# Altium PCB PCB1.PcbDoc
Units mm, origin at the board's own origin, x right, y up, seen from the top; angles counter-clockwise.
Board outline 20 x 39 mm, 2 copper layers (Top Layer, Bottom Layer); 52 components, 24 nets, 154 pads, 51 vias.
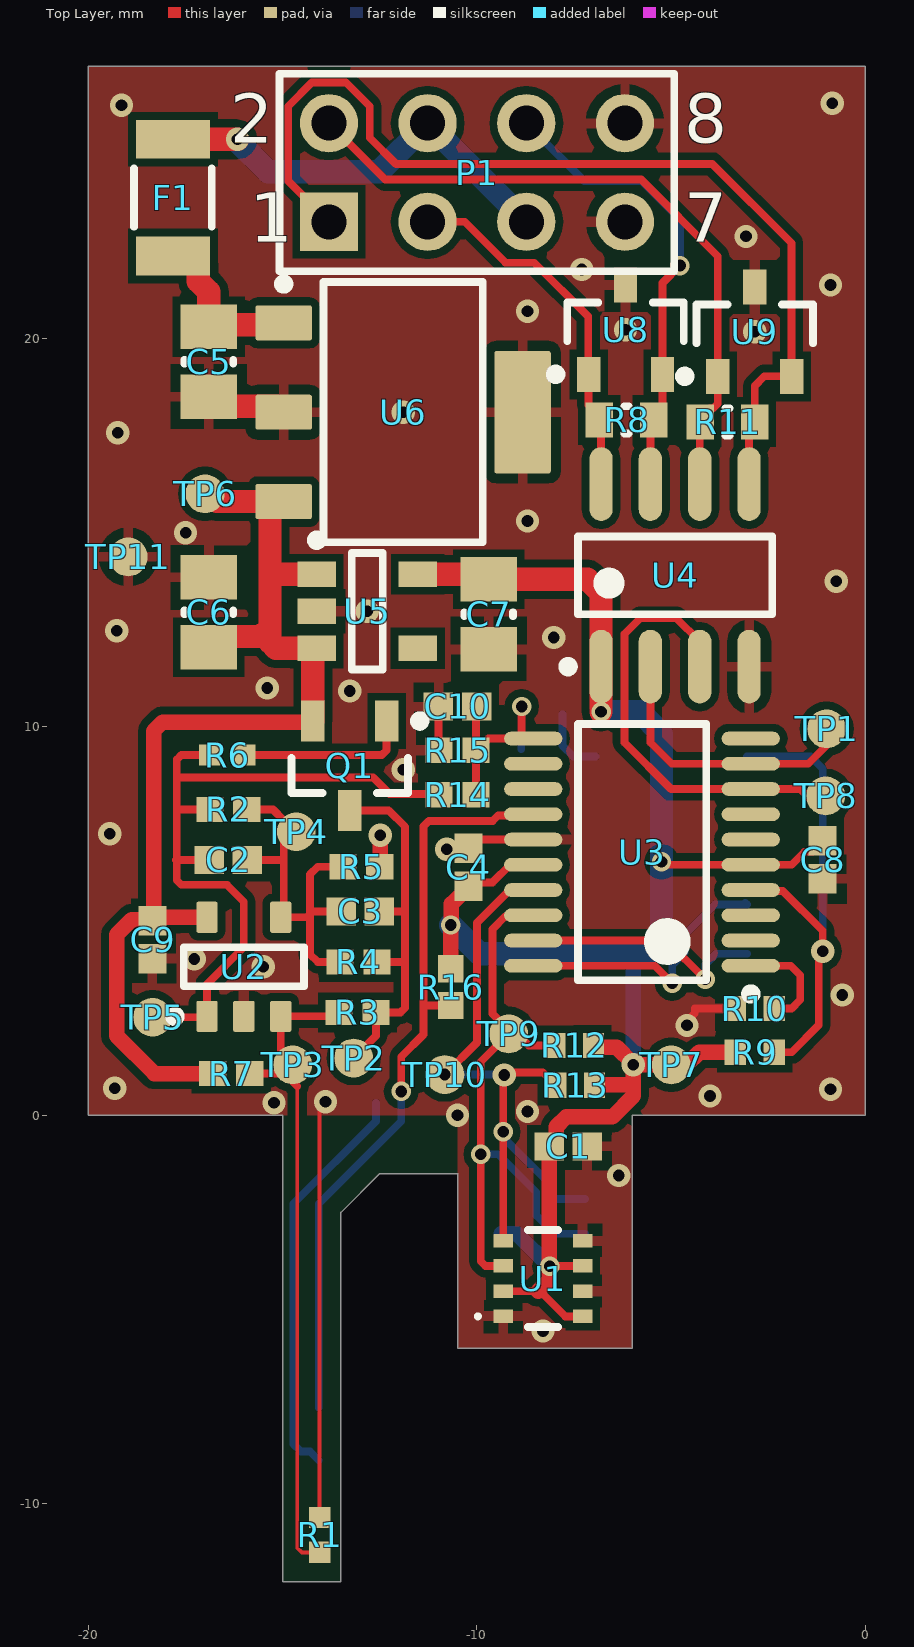
[diagram p0: Top Layer view]
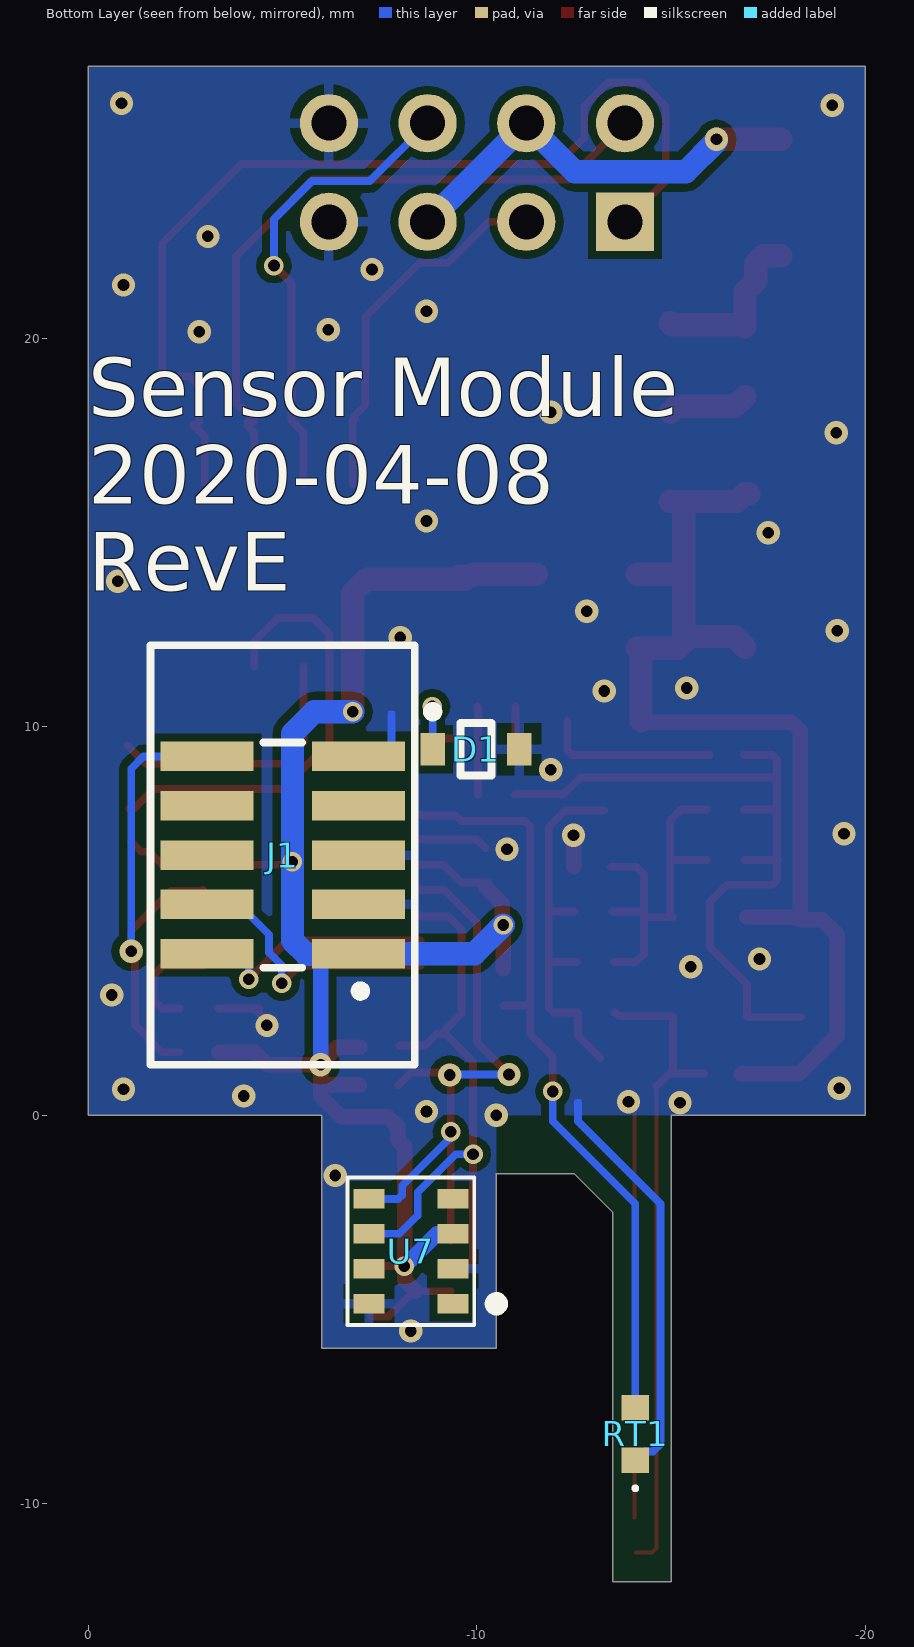
[diagram p1: Bottom Layer view, seen from below]

## Layer stack, top to bottom
Top Solder: solder mask 0.0102, Solder Resist, Dk 3.5
Top Layer: signal copper 0.0356
Dielectric 1: dielectric 0.32, FR-4, Dk 4.8
Bottom Layer: signal copper 0.0356
Bottom Solder: solder mask 0.0102, Solder Resist, Dk 3.5

## Board outline
-15,-12 -15,0 -20,0 -20,27 0,27 0,0 -6,0 -6,-6 -10.5,-6 -10.5,-1.5 -12.5,-1.5 -13.5,-2.5 -13.5,-12

## Design rules (kind name [scope] priority, off if disabled: settings)
Clearance [All] p1: gap=0.2 ignorepadtopadclearanceinfootprint=FALSE
PolygonConnect [All] p1: thpad.connectstyle=Relief thpad.reliefconductorwidth=0.254 thpad.reliefentries=4 thpad.polygonreliefangle="90 Angle" thpad.airgapwidth=0.254 smdpad.connectstyle=Relief smdpad.reliefconductorwidth=0.254 smdpad.reliefentries=4 smdpad.polygonreliefangle="90 Angle" smdpad.airgapwidth=0.254 via.connectstyle=Direct via.reliefconductorwidth=0.254 via.reliefentries=4 via.polygonreliefangle="90 Angle" via.airgapwidth=0.254
RoomDefinition Sheet1 [InComponentClass('Sheet1')] p1: confinementstyle=ConfineIn formatcopy=TRUE lockcomponents=FALSE outline -20,-12 0,-12 0,27 -20,27
RoutingVias [All] p1: holewidth=0.3 width=0.6 viastyle="Through Hole" minholewidth=0.3 minwidth=0.5 maxholewidth=0.711 maxwidth=1.27
SolderMaskExpansion SolderMaskExpansion_1 [IsVia] p1: expansion=-999 istentingtop=FALSE
SolderMaskExpansion [All] p2: expansion=0.102 istentingtop=FALSE
Width [All] p1: maxlimit=0.6 minlimit=0.2 preferedwidth=0.4
30 further rules are at their usual default settings.

## Components (designator, comment, footprint, x,y, rotation, side; value= is the part's Value field where it differs from the comment)
C1 "GRM155R71C104KA88D" CAPC1005X55X25ML05T10 -7.65,-0.8 r180 top
C2 "100nF" CAPC1005X55X25ML05T10 -16.4,6.575 r0 top
C3 "1uF" CAPC1005X55X25ML05T10 -13,5.25 r180 top
C4 "GRM155R71C104KA88D" CAPC1005X55X25ML05T10 -10.222,6.388 r270 top
C5 "CAP 10uF 10V 0805(2012)" CAPC0805(2012)145_N -16.9,19.4 r90 top value=10uF
C6 "CAP 10uF 10V 0805(2012)" CAPC0805(2012)145_N -16.9,12.95 r270 top value=10uF
C7 "CAP 10uF 10V 0805(2012)" CAPC0805(2012)145_N -9.7,12.9 r90 top value=10uF
C8 "GRM155R71C104KA88D" CAPC1005X55X25ML05T10 -1.1,6.575 r90 top
C9 "GRM155R71C104KA88D" CAPC1005X55X25ML05T10 -18.35,4.525 r90 top
C10 "TBD" CAPC1005X55X25ML05T10 -10.5,10.525 r180 top
D1 "MM3Z3V3T1G" ONSC-SOD-323-2-477-02_V -9.975,9.425 r180 bottom
F1 "nSMD020-30V" SEAANDLAND_1206 -17.825,23.625 r270 top
J1 "ARM Cortex JTAG" "1.27mm 2x5 SMD Header - no paste" -5,6.7 r90 bottom
P1 "Header 4X2" HDR2X4 -13.81,23 r0 top
Q1 "SMBT2907A" INF-SOT23_N -13.275,9 r270 top
R1 "NTC470, B=3380" RESC1005X40X25NL05T05 -14.05,-10.8 r270 top
R2 "10M 1%" RESC1005X40X25ML05T10 -16.4,7.875 r0 top
R3 "2R21 0.1%" RESC1005X40X25ML05T10 -13.075,2.65 r0 top
R4 "2K 0.1%" RESC1005X40X25ML05T10 -13.05,3.95 r0 top
R5 "75K 0.1%" RESC1005X40X25ML05T10 -12.975,6.4 r180 top
R6 "2K 1%" RESC1005X40X25NL05T05 -16.425,9.275 r180 top
R7 "100K 1%" RESC1005X40X25ML05T10 -16.325,1.075 r0 top
R8 "120R 5% 0603(1608)" RESC0603(1608)_L -6.15,17.905 r180 top value="120.00 Ohm"
R9 "10K 5% 0402(1005)" RESC0402(1005)_N -2.85,1.625 r0 top value="10000.00 Ohm"
R10 "10K 5% 0402(1005)" RESC0402(1005)_N -2.85,2.75 r180 top value="10000.00 Ohm"
R11 "120R 5% 0603(1608)" RESC0603(1608)_L -3.55,17.85 r0 top value="120.00 Ohm"
R12 "2K2 5% 0402(1005)" RESC0402(1005)_N -7.5,1.8 r0 top value="2200.00 Ohm"
R13 "2K2 5% 0402(1005)" RESC0402(1005)_N -7.475,0.775 r0 top value="2200.00 Ohm"
R14 "TBD" RESC1005X40X25ML05T10 -10.5,8.25 r180 top
R15 "TBD" RESC1005X40X25ML05T10 -10.5,9.4 r180 top
R16 "10k" RESC1005X40X25ML05T10 -10.675,3.3 r270 top
RT1 "NCP18XH103F03RB" MURA-NCP18XH103F03RB-2_V -14.075,-8.2 r90 bottom
TP1 "TEST_POINT" TP-SMD-1mm -1,9.95 r270 top
TP2 "TEST_POINT" TP-SMD-1mm -13.175,1.475 r270 top
TP3 "TEST_POINT" TP-SMD-1mm -14.744,1.302 r270 top
TP4 "TEST_POINT" TP-SMD-1mm -14.65,7.3 r270 top
TP5 "TEST_POINT" TP-SMD-1mm -18.35,2.525 r270 top
TP6 "TEST_POINT" TP-SMD-1mm -17,16 r270 top
TP7 "TEST_POINT" TP-SMD-1mm -5,1.3 r270 top
TP8 "TEST_POINT" TP-SMD-1mm -1.025,8.225 r270 top
TP9 "TEST_POINT" TP-SMD-1mm -9.183,2.098 r270 top
TP10 "TEST_POINT" TP-SMD-1mm -10.825,1.05 r270 top
TP11 "TEST_POINT" TP-SMD-1mm -18.975,14.375 r270 top
U1 "BME280" BOSC-BME280-8_V -8.3,-4.2 r180 top
U2 "TLV2471IDBVT" DBV0005A_L -16,3.825 r90 top
U3 "STM32F030F4P6" STM-TSSOP20_L -5.75,6.775 r180 top
U4 "ADM3488ARZ" ADI-R-8_L -4.9,13.9 r90 top
U5 "MIC5504-3.3YM5-TR" MCHP-SOT-23-M5_V -12.825,12.975 r0 top
U6 "LM2940IMP-9.0/NOPB" DCY0004A_L -11.9,18.1 r0 top
U7 "HP203B" HP203B -8.3,-3.5 r0 bottom
U8 "CDSOT23-SM712" SOT95P230X117-3N -6.175,20.225 r90 top
U9 "CDSOT23-SM712" SOT95P230X117-3N -2.85,20.175 r90 top

## Footprints (in the part's own frame and the unit in brackets; to place one, negate y for a bottom-side part, rotate by r counter-clockwise, add the part's x,y. Pads: shape width x height; smd on the part's side, far side on the other; paste and mask are expansions set on the pad)
"1.27mm 2x5 SMD Header - no paste" [mm]
  rect 0.76x2.4 smd paste-99: 1(-2.54,-1.95) 2(-2.54,1.95) 3(-1.27,-1.95) 4(-1.27,1.95) 5(0,-1.95) 6(0,1.95) 7(1.27,-1.95) 8(1.27,1.95) 9(2.54,-1.95) 10(2.54,1.95)
  silkscreen extent -5.4,-3.4 5.4,3.4
ADI-R-8_L [mm] "SOIC, 8-Leads, Body 5x4mm, Pitch 1.27mm, IPC High Density"
  oval 1.9x0.6 smd: 1(-2.35,1.905) 2(-2.35,0.635) 3(-2.35,-0.635) 4(-2.35,-1.905) 5(2.35,-1.905) 6(2.35,-0.635) 7(2.35,0.635) 8(2.35,1.905)
  silkscreen extent -2.47,-2.5 1,2.88, body extent -2,-2.5 2,2.5, height 1.75
BOSC-BME280-8_V [mm] "SMD, 8-Leads, Body 2.5x2.5mm, Pitch 0.65mm"
  rect 0.5x0.35 smd: 1(1.025,0.975) 2(1.025,0.325) 3(1.025,-0.325) 4(1.025,-0.975) 5(-1.025,-0.975) 6(-1.025,-0.325) 7(-1.025,0.325) 8(-1.025,0.975)
  silkscreen extent -0.39,-1.25 1.72,1.25, body extent -1.25,-1.25 1.25,1.25, height 1
CAPC0805(2012)145_N [mm] "Chip Capacitor, Body 2.0x1.2mm, Height 1.45mm, IPC Medium Density"
  rect 1.15x1.45 smd: 1(-0.9,0) 2(0.9,0)
  silkscreen extent -0.05,-0.62 0.05,0.63, body extent -1.1,-0.72 1.1,0.73, height 1.45
CAPC1005X55X25ML05T10 [mm] "Chip Capacitor, 2-Leads, Body 1.00x0.50mm, IPC Low Density"
  rect 0.76x0.72 smd: 1(-0.49,0) 2(0.49,0)
  body extent -0.53,-0.28 0.53,0.27, height 0.55
DBV0005A_L [mm] "SOT23, 5-Leads, Body 3.05x1.75mm, Pitch 0.95mm, IPC High Density"
  rrect18% 0.8x0.55 smd: 1(-1.275,0.95) 2(-1.275,0) 3(-1.275,-0.95) 4(1.275,-0.95) 5(1.275,0.95)
  silkscreen extent -1.4,-1.55 0.5,1.9, body extent -1.42,-1.46 1.42,1.46, height 1.08
DCY0004A_L [mm] "SOT223, 4-Leads, Body 6.7x3.7mm, Pitch 2.3mm, IPC High Density"
  rrect11% 1.45x0.9 smd: 1(-3.075,2.3) 2(-3.075,0) 3(-3.075,-2.3)
  rrect7% 1.45x3.15 smd: 4(3.075,0)
  silkscreen extent -3.2,-3.35 2.05,3.42, body extent -3.5,-3.25 3.5,3.25, height 1.62
HDR2X4 [mm] "Connector; Header; 4x2 Position"
  rect 1.5x1.5 hole 0.9: 1(0,0)
  round 1.5 hole 0.9: 2(0,2.54) 3(2.54,0) 4(2.54,2.54) 5(5.08,0) 6(5.08,2.54) 7(7.62,0) 8(7.62,2.54)
  silkscreen extent -1.27,-1.27 8.89,3.81
HP203B [mm] "PRECISION BAROMETER AND ALTIMETER SENSOR"
  rect 0.8x0.5 smd: 1(-1.08,1.35) 2(-1.08,0.45) 3(-1.08,-0.45) 4(-1.08,-1.35) 5(1.08,-1.35) 6(1.08,-0.45) 7(1.08,0.45) 8(1.08,1.35)
  silkscreen extent -2.35,-1.9 1.63,1.9, body extent -1.63,-1.9 1.63,1.9, height 1.2
INF-SOT23_N [mm] "SOT23, 3-Leads, Body 2.9x1.3 mm, Pitch 0.95 mm, IPC Medium Density"
  rect 1.05x0.6 smd: 1(-1.15,0.95) 2(-1.15,-0.95) 3(1.15,0)
  silkscreen extent -1.27,-1.5 0.7,1.93, body extent -0.7,-1.5 0.7,1.5, height 1.1
MCHP-SOT-23-M5_V [mm] "SOT-23, 5-Leads, Body 3x1.7mm, Pitch 0.95mm"
  rect 1x0.66 smd: 1(-1.3,0.95) 2(-1.3,0) 3(-1.3,-0.95) 4(1.3,-0.95) 5(1.3,0.95)
  silkscreen extent -1.42,-1.5 0.4,1.95, body extent -1.5,-1.5 1.5,1.5, height 1.45
MURA-NCP18XH103F03RB-2_V [mm] "Chip, 2-Leads, Body 1.6x0.8mm"
  rect 0.65x0.7 smd: 1(-0.675,0) 2(0.675,0)
  silkscreen extent -1.45,-0.05 -1.35,0.05, body extent -0.8,-0.4 0.8,0.4, height 0.8
ONSC-SOD-323-2-477-02_V [mm] "SOD, 2-Leads, Body 1.7x1.25mm"
  rect 0.63x0.83 smd: 1(-1.115,0) 2(1.115,0)
  silkscreen extent -1.24,-0.67 0.4,1.09, body extent -0.85,-0.63 0.85,0.63, height 1.06
RESC0402(1005)_N [mm] "Chip Resistor, Body 1.0x0.5mm, IPC Medium Density"
  rect 0.55x0.65 smd: 1(-0.5,0) 2(0.5,0)
  body extent -0.52,-0.27 0.53,0.28, height 0.4
RESC0603(1608)_L [mm] "Chip Resistor, Body 1.6x0.8mm, IPC High Density"
  rect 0.7x0.9 smd: 1(-0.7,0) 2(0.7,0)
  silkscreen extent -0.05,-0.35 0.05,0.35, body extent -0.85,-0.47 0.85,0.47, height 0.6
RESC1005X40X25ML05T10 [mm] "Chip Resistor, 2-Leads, Body 1.00x0.50mm, IPC Low Density"
  rect 0.7x0.65 smd: 1(-0.475,0) 2(0.475,0)
  body extent -0.53,-0.27 0.53,0.28, height 0.4
RESC1005X40X25NL05T05 [mm] "Chip Resistor, 2-Leads, Body 1.00x0.50mm, IPC Medium Density"
  rect 0.55x0.55 smd: 1(-0.45,0) 2(0.45,0)
  body extent -0.53,-0.27 0.53,0.28, height 0.4
SEAANDLAND_1206 [mm] "Surface Mount Fuses 1206"
  rrect0% 1x1.9 smd paste+0: 1(-1.5,0) 2(1.5,0)
  silkscreen extent -0.75,-1 0.75,1, body extent -1.63,-0.82 1.62,0.82, height 2
SOT95P230X117-3N [mm] "SOT23, 3-Leads, Body 2.90x2.30mm, Pitch 0.95mm, IPC Medium Density"
  rect 0.9x0.6 smd: 1(-1.15,0.95) 2(-1.15,-0.95) 3(1.15,0)
  silkscreen extent -1.27,-1.5 0.7,1.92, body extent -1.24,-1.5 1.25,1.5, height 1.17
STM-TSSOP20_L [mm] "SOP, 20-Leads, Body 6.6x4.5mm, Pitch 0.65mm, IPC High Density"
  oval 1.5x0.35 smd: 1(-2.8,2.925) 2(-2.8,2.275) 3(-2.8,1.625) 4(-2.8,0.975) 5(-2.8,0.325) 6(-2.8,-0.325) 7(-2.8,-0.975) 8(-2.8,-1.625) 9(-2.8,-2.275) 10(-2.8,-2.925) 11(2.8,-2.925) 12(2.8,-2.275) 13(2.8,-1.625) 14(2.8,-0.975) 15(2.8,-0.325) 16(2.8,0.325) 17(2.8,0.975) 18(2.8,1.625) 19(2.8,2.275) 20(2.8,2.925)
  silkscreen extent -2.93,-3.3 1.65,3.77, body extent -2.25,-3.3 2.25,3.3, height 1.2
TP-SMD-1mm [mm] "Test point, round, 1mm, SMD"
  round 1 smd paste-999: 1(0,0)

## Part data
C1 C3 C4 C8 C9 C10: library part CMP-2100-03641-1, "Chip Capacitor, 0.1 uF, +/- 10%, 16 V, -55 to 125 degC, 0402 (1005 Metric), RoHS, Tape and Reel", Capacitance=100nF, Case Code (Imperial)=0402, Case Code (Metric)=1005, Dielectric=X7R, Dielectric Material=Ceramic, Insulation Resistance=10GR, Manufacturer=Murata, Max Operating Temperature=125degC, Min Operating Temperature=-55degC, Package Description="2-Pin Surface Mount Device, Body 1 x 0.5 mm", Package Quantity=1, Tolerance=10%, Voltage=16V, Case/Package=0402, Datasheet URL=http://psearch.en.murata.com/capacitor/product/GRM155R71C104KA88%23.pdf, Datasheet Version=42675.0, Depth=0.5mm, Height=0.5mm, Lead Free=LeadFree, Length=1mm, Manufacturer URL=http://www.murata.com/, Material=Ceramic, Mount=SurfaceMount, Number of Pins=2, Package Reference=0402, Packaging=TapeandReel, Radiation Hardening=No, REACH SVHC=NoSVHC, RoHSCompliant=true, Termination=SMD/SMT, Thickness=0.022inch, Voltage Rating=16V, Voltage Rating (DC)=16V, Width=0.5mm
C2: library part CMP-2100-03641-1, "Chip Capacitor, 0.1 uF, +/- 10%, 16 V, -55 to 125 degC, 0402 (1005 Metric), RoHS, Tape and Reel", Case Code (Imperial)=0402, Case Code (Metric)=1005, Dielectric=X7R, Dielectric Material=Ceramic, Insulation Resistance=10GR, Manufacturer=Murata, Max Operating Temperature=125degC, Min Operating Temperature=-55degC, Package Description="2-Pin Surface Mount Device, Body 1 x 0.5 mm", Package Quantity=1, Tolerance=10%, Voltage=16V, Capacitance=100nF, Case/Package=0402, Datasheet URL=http://psearch.en.murata.com/capacitor/product/GRM155R71C104KA88%23.pdf, Datasheet Version=42675.0, Depth=0.5mm, Height=0.5mm, Lead Free=LeadFree, Length=1mm, Manufacturer URL=http://www.murata.com/, Material=Ceramic, Mount=SurfaceMount, Number of Pins=2, Package Reference=0402, Packaging=TapeandReel, Radiation Hardening=No, REACH SVHC=NoSVHC, RoHSCompliant=true, Termination=SMD/SMT, Thickness=0.022inch, Voltage Rating=16V, Voltage Rating (DC)=16V, Width=0.5mm
C5 C6 C7: library part CMP-1036-04922-1, "CAP 10uF 10V ±10% 0805 (2012 Metric) Thickness 1.45mm SMD", Case-EIA=0805, Case-Metric=2012, Rated Voltage="10 V", Tolerance=Â±10%, Max Thickness="1.45 mm", Technology=SMT
D1: library part CMP-1060-00672-1, "Zener Voltage Regulator, 300 mW, 2-Pin SOD-323, Pb-Free, Tape and Reel", Manufacturer="On Semiconductor", ComponentLink1Description="Manufacturer URL", ComponentLink1URL=http://www.onsemi.com/, ComponentLink2Description=Datasheet, ComponentLink2URL=http://www.onsemi.cn/pub_link/Collateral/MM3Z2V4T1-D.PDF, ComponentLink3Description="Package Specification", ComponentLink3URL=http://www.onsemi.com/pub_link/Collateral/477-02.PDF.1, DatasheetVersion="Rev. 9", Mounting Technology="Surface Mount", P Max (W)=0.3, PackageDescription="2-Pin SOD, Body 1.7 x 1.25 mm", PackageReference=SOD-323-2-477-02, PackageVersion="Rev. H, 03/2007", Packing="Tape and Reel", PartNumber=MM3Z3V3T1G, RoHS=Pb-Free, VZ Typ (V)=3.3
F1: "Surface Mount Fuses 30V 100A 200mA 460mA 1206 RoHS", Manufacturer="Sea & Land Electronic Corp", PartNumber=NSMD020-30V, ComponentLink2Description=Datasheet, ComponentLink2URL="nSMD020-30V 0-2A-30V-Self-healing-fuse_C69680.pdf"
J1: "Arm Cortex 10-pin JTAG connector", Manufacturer=Unknown/Generic, PartNumber=unknown/Generic
P1: "Header, 4-Pin, Dual row", LatestRevisionDate=17-Jul-2002, LatestRevisionNote="Re-released for DXP Platform.", Publisher="Altium Limited"
Q1: library part CMP-1178-00003-1, "PNP Silicon Switching Transistor, 60 V VCEO, 600 mA IC, SOT23, Reel, Green", Manufacturer=Infineon, ComponentLink1Description="Manufacturer URL", ComponentLink1URL=http://www.infineon.com/, ComponentLink2Description=Datasheet, ComponentLink2URL=http://www.infineon.com/dgdl/smbt2907a.pdf?folderId=db3a30431441fb5d011445fab851018e&fileId=db3a30431441fb5d011445fe084a0190, ComponentLink3Description="Package Specification", ComponentLink3URL=http://www.infineon.com/dgdl/SOT23-Package_Overview.pdf?folderId=db3a30431936bc4b0119532290053c66&fileId=db3a30431936bc4b0119533468123c85, Green=TRUE, IC="150 mA", IC (max)="600 mA", ICBO (max)="10 nA", Mounting Technology="Surface Mount", PackageDescription="3-Pin Small Outline Transistor Package, 1.3 x 2.9 mm Body, 0.95 mm Pitch", PackageReference=SOT23, PackageVersion=Apr-08, Packing=Reel, PartNumber=SMBT2907A, Polarity=PNP, VCBO (max)="60 V", VCE="10 V", VCE (max)="10 V", VCEO (max)="60 V", VEBO (max)="5 V"
R1 R6: library part CMP-2002-01187-1, Manufacturer=Panasonic, Part Number=ERT-J0EV474J
R2 R3 R4 R5 R7 R14 R15 R16: library part CMP-2002-07472-1, Manufacturer="Yageo / Phycomp", Part Number=RC0402FR-071KL
R8 R11: library part CMP-1012-00052-1, "120R 0.1W 5% 0603 (1608 Metric)  SMD", Case-EIA=0603, Case-Metric=1608, Power="0.1 W", Tolerance="5 %", Technology=SMT
R9 R10: library part CMP-1011-00098-1, "10K 0.063W 5% 0402 (1005 Metric)  SMD", Case-EIA=0402, Case-Metric=1005, Power="0.063 W", Tolerance="5 %", Technology=SMT
R12 R13: library part CMP-1011-00082-1, "2K2 0.063W 5% 0402 (1005 Metric)  SMD", Case-EIA=0402, Case-Metric=1005, Power="0.063 W", Tolerance="5 %", Technology=SMT
RT1: library part CMP-2000-05271-1, "NTC Thermistor, 10 KOhm, +/- 1%, 0.1 W, -40 to 125 degC, 0603 (1608 Metric), RoHS, Tape and Reel", Manufacturer=Murata, Rated Current=310A, Resistance=10kO, Temperature Range=-40to+125degC, Tolerance (%)=±1%, B-constant=3434K, Datasheet URL=http://www.jameco.com/Jameco/Products/ProdDS/1870999.pdf, Datasheet Version=Apr-05, Manufacturer URL=http://www.murata.com/, Type=NTC
TP1 TP2 TP3 TP4 TP5 TP6 TP7 TP8 TP9 TP10 TP11: "Test point"
U1: library part CMP-2000-05073-1, "Combined Humidity and Pressure Sensor, 1.71 to 3.6 V, -40 to 85 degC, 8-Pin SMD, RoHS, Tape and Reel", Manufacturer="Bosch Sensortec", Datasheet URL=http://datasheet.octopart.com/BME280-Bosch-datasheet-58577763.pdf, Datasheet Version="Rev. 1.2, 10/2015", Manufacturer URL=http://www.bosch-sensortec.com
U2: library part CMP-0271-00230-3, "Single Low-Power Rail-to-Rail Input / Output Operational Amplifier, 2.7 to 6 V, -40 to 125 degC, 5-pin SOT23 (DBV5), Green (RoHS & no Sb/Br)", Manufacturer="Texas Instruments", Total Supply Voltage(Max)(+5V is 5, +/-5V is 10)=6, Total Supply Voltage(Min)(+5V is 5, +/-5V is 10)=2.7, CMRR(Min)(dB)=61, Code_JEDEC=MO-178, ComponentLink1Description="Manufacturer URL", ComponentLink1URL=http://www.ti.com/, ComponentLink2Description=Datasheet, ComponentLink2URL=http://www.ti.com/general/docs/lit/getliterature.tsp?genericPartNumber=TLV2471&fileType=pdf, ComponentLink3Description="Package Specification", ComponentLink3URL=http://www.ti.com/litv/pdf/mpds018i, DatasheetVersion=SLOS232E, Eco-Plan="Green (RoHS & no Sb/Br)", IIB(Max)(pA)=50, Iq per channel(Max)(mA)=0.75, Mounting Technology="Surface Mount", Number of Channels=1, Offset Drift(Typ)(uV/C)=0.4, PackageDescription="5-Pin Plastic Small Outline, Body 1.6 x 2.9 mm, Pitch 0.95 mm", PackageReference=DBV0005A, PackageVersion="4073253-4/K, 03/2006", PartNumber=TLV2471IDBVT, Slew Rate(Typ)(V/us)=1.4, Sub Family="Low Supply Voltage Amplifier (<=2.7V), Precision Amplifier", Vio (25C)(Max)(mV)=2.2, Vn at 1kHz(Typ)(nV/rtHz)=15
U3: library part CMP-0304-00039-2, "ARM Cortex-M0 32-bit MCU, 16 KB Flash, 4 KB Internal RAM, 15 I/Os, 20-pin TSSOP, -40 to 85 degC, Tube", I/Os (High Current)=15, Operating Frequency(F) (Processor speed) (MHz)=48, Supply Voltage(Vcc) min (V)=2.4, ComponentLink1Description="Manufacturer URL", ComponentLink1URL=http://www.st.com/web/en/home.html, ComponentLink2Description=Datasheet, ComponentLink2URL=http://www.st.com/st-web-ui/static/active/en/resource/technical/document/datasheet/DM00088500.pdf, ComponentLink3Description="Package Specification", ComponentLink3URL=http://www.st.com/st-web-ui/static/active/en/resource/technical/document/datasheet/DM00065136.pdf, Core="ARM Cortex-M0", DatasheetVersion="Rev. 1", FLASH Size (Prog) (kB)=16, Internal RAM Size (kB)=4, Mounting Technology="Surface Mount", PackageDescription="20-Pin Thin Shrink Small Outline Package, 6.5 x 4.4 mm Body, 0.65 mm Pitch", PackageReference=TSSOP20, PackageVersion="Rev. 1, 11/2012", Packing=Tube, PartNumber=STM32F030F4P6
U4: library part CMP-0535-00058-1, "3.3 V Slew Rate Limited, Full-Duplex, RS-485/RS-422 Transceivers, 3 to 3.6 V, -40 to 85 degC, 8-Pin SOIC (R-8), RoHS, Tube", Manufacturer="Analog Devices", Supply Voltage="3 to 3.6 V", Temperature Range="-40 to 85 degC", ComponentLink1Description="Manufacturer URL", ComponentLink1URL=http://www.analog.com/en/index.html, ComponentLink2Description=Datasheet, ComponentLink2URL=http://www.analog.com/static/imported-files/data_sheets/ADM3483_3485_3488_3490_3491.pdf, ComponentLink3Description="Package Specification", ComponentLink3URL=http://www.analog.com/media/en/package-pcb-resources/package/pkg_pdf/soic_narrow-r/r_8.pdf, DatasheetVersion="Rev. E", Duplex=Full, Guaranteed Data Rate="0.25 Mbps", Mounting Technology="Surface Mount", Number of Drivers=1, PackageDescription="8-Pin Standard Small Outline Package, Body 4.9 x 3.9 mm, Pitch 1.27 mm", PackageVersion=06/2006, Packing=Tube, PartNumber=ADM3488ARZ, Receiver Hysteresis="50 mV", RoHS=TRUE
U5: library part CMP-2000-07604-1, "Single LDO, 2.5 to 5.5 V, Fixed Out 3.3 V, 0.3 A, -40 to 125 degC, 5-Pin SOT-23 (M5), RoHS, Tape and Reel", Case\/Package=SOT-23, Dropout Voltage=160mV, Manufacturer=Microchip, Max Input Voltage=5.5V, Max Operating Temperature=125degC, Min Current Limit=400mA, Min Input Voltage=2.5V, Min Operating Temperature=-40degC, Nominal Output Voltage=3.3V, Output Current=300mA, Package Description="5-Pin Small Outline Transistor, Body 1.6 x 2.9 mm, Pitch 0.95 mm", Datasheet URL=http://ww1.microchip.com/downloads/en/DeviceDoc/MIC550X.pdf, Datasheet Version="Rev. 2.3, 04/2015", Lead Free=LeadFree, Manufacturer URL=http://www.microchip.com/, Mount=SurfaceMount, Mounting Technology=SurfaceMount, Number of Pins=5, Number of Regulators=1, Output Voltage=3.3V, Package Reference=SOT-23, Packaging=CutTape, REACH SVHC=NoSVHC, RoHSCompliant=True
U6: library part CMP-0062-01727-3, "1A Low Dropout Regulator, 4-pin SOT-223, Pb-Free", Manufacturer="Texas Instruments", PackageTopMarking=XYTT*L0EB, PowerWise=N, Code_IPC=SOT223-4, Code_JEDEC=TO-261-AA, ComponentLink1Description="Datasheet URL", ComponentLink1URL=http://www.ti.com/general/docs/lit/getliterature.tsp?genericPartNumber=LM2940-N&fileType=pdf, CompType="LDO IC", PackageDescription="Molded SOT-223, 6.50 x 3.56 x 1.6mm Body, 4 Lead, 2.3mm Pitch", PackageReference=DCY0004A, PinCount=4, RoHS=Y
U7: "PRECISION BAROMETER AND ALTIMETER SENSOR", Manufacturer=HopeRF, PartNumber=HP203B
U8 U9: "600 WATT TVS ARRAY - ASYMMETRICAL DATA LINE PROTECTOR", Manufacturer=Bourns, ComponentLink2Description=Datasheet, ComponentLink2URL="Bourns CDSOT23-SM712.pdf", PartNumber=CDSOT23-SM712

## Via types
v1: diameter 0.6, hole 0.3, Top Layer to Bottom Layer, 40 vias
v2: diameter 0.5, hole 0.3, Top Layer to Bottom Layer, 11 vias

## Nets (pads, with @x,y where several pads share a name; then routed paths per layer and width w, separated by ;. In a path a pad name is that pad's centre, name@x,y a point inside that pad or via, vN(x,y) a via of type N, cw(c..) or ccw(c..) an arc to the next point about the centre after c; other vN are vias at no path point)
+3.3V: C1.2 C4.2 C7.2 C8.2 J1.1 R9.1 R12.2 R13.2 R16.1 TP7.1 U1.2 U1.6 U1.8 U3.5 U3.16 U4.1 U5.5 U7.3 | length 49.9
  Top Layer w0.2: C4.2 -10.123,5.997 -9.6,5.997 -9.147,6.45 U3.16 ; U1.2 -8.425,-4.525 ; -8.4,-4.5 -7.725,-5.175 U1.8 ; v2@-8.14,-3.9 v2(-8.128,-3.888) -8.115,-3.875 U1.6 ; v2(-5.25,6.525) -5.175,6.45 U3.5 -1.9,6.45 -1.565,6.785 -1.36,6.785 -1.1,7.045 C8.2
  Top Layer w0.4: R16.1 v2(-10.675,4.9) -10.656,4.919 -10.656,5.444 -10.222,5.877 C4.2 ; -8.425,-4.525 -8.4,-4.5 -8.14,-4.24 -8.14,-3.9 C1.2 ; C1.2@-8.13,-0.81 -7.96,-0.64 -7.96,-0.294 -7.706,-0.04 -6.515,-0.04 -5.975,0.5 -5.975,0.79 ; R12.2@-6.981,1.752 -6.4,1.752 v1@-5.994,1.346 ; R13.2 -6.96,0.79 -5.975,0.79 ; R9.1 -4.278,1.625 -4.603,1.3 TP7.1 v1(-5.975,1.3) -5.975,0.79
  Top Layer w0.6: U5.5 -9.9,13.925 -9.85,13.875 C7.2@-9.53,13.875 ; C7.2 -7.156,13.8 -6.805,13.449 U4.1 v2(-6.805,10.39)
  Bottom Layer w0.4: U7.3 -8.965,-3.05 v2(-8.128,-3.888) ; J1.1@-6.145,4.15 -5.975,3.98 v1@-5.975,1.346
  Bottom Layer w0.6: v2(-10.675,4.9) -9.935,4.16 J1.1 -6.94,4.15 -6.145,4.15 -5.601,4.15 -5.25,4.501 -5.25,9.827 -5.813,10.39 v2(-6.805,10.39)
+9V: C6.2 C9.2 Q1.2 R7.1 TP6.1 U2.5 U5.1 U5.3 U6.3 | length 29
  Top Layer w0.4: C9.2@-18.325,5.1 U2.5 ; R7.1 -18.3,1.075 -19.275,2.05 -19.275,4.65 -18.885,5.04 -18.575,5.04 -18.325,5.04 -18.325,9.891 -18.091,10.125 -14.325,10.125 -14.3,10.15 Q1.2
  Top Layer w0.6: TP6.1 -16.892,16 -16.692,15.8 U6.3@-15.175,15.8 ; C6.2 -16.625,12.325 -15.576,12.325 -15.525,12.376 -15.325,12.176 ; U6.3 U6.3@-15.175,15.8 ; Q1.2 -14.225,11.995 U5.3@-14.195,12.025 ; U5.3 U5.3@-14.195,12.025 ; U5.1 -15.325,13.925 ; -15.325,12.176 -15.325,13.925 ; -15.325,12.176 -15.174,12.025 U5.3@-14.195,12.025 ; -15.325,13.925 -15.325,15.65 U6.3@-15.175,15.8
+12V: F1.1 P1.4 P1.5 | length 11.2
  Top Layer w0.6: F1.1 v1(-16.165,25.125)
  Bottom Layer w0.6: v1(-16.165,25.125) -16.165,25.08 -15.375,24.29 -12.52,24.29 P1.4 P1.5 P1.5@-8.9,23
\R\S\T: J1.10 R9.2 U3.4 | length 13
  Top Layer w0.2: U3.4 -2.927,5.777 -2.127,5.777 -1.1,4.75 v1(-1.1,4.225) -1.2,4.125 -1.2,2.325 -1.9,1.625 R9.2
  Bottom Layer w0.2: J1.10 -1.415,9.24 -1.1,8.925 v1(-1.1,4.225)
BOOT0: R10.1 U3.1 | length 2.8
  Top Layer w0.2: U3.1 -1.92,3.85 -1.675,3.605 -1.675,2.975 -1.9,2.75 R10.1
GND: C1.1 C4.1 C5.1 C6.1 C7.1 C8.1 C9.1 C10.2 D1.2 J1.3 J1.5 J1.9 P1.7 P1.8 R1.1 R5.1 R10.2 R15.2 RT1.1 TP11.1 U1.1 U1.5 U1.7 U2.2 U3.15 U4.4 U5.2 U6.2 U6.4 U7.2 U7.8 U8.3 U9.3 | length 30.5
  Top Layer w0.102: R1.1 v1@-14.05,0.5
  Top Layer w0.2: C10.2 -10.99,9.415 R15.2 ; C4.1 -10,7.1 U3.15 ; v1(-4.593,2.315) -4.593,2.427 -4.392,2.628 -4.392,2.75 R10.2
  Top Layer w0.4: R5.1 -12.494,6.406 -12.494,7.208 v1(-12.487,7.214)
  Top Layer w0.6: C5.1 -16.65,18.25 -15.125,18.25 U6.2
  Bottom Layer w0.2: RT1.1 -14.3,-8.65 -14.533,-8.65 -14.725,-8.458 -14.725,-2.275 -12.6,-0.15 -12.6,0.325 ; -7.8,10.325 -7.8,9.52 -7.52,9.24 J1.9
  other v1: -8.3,-5.55 -6.35,-1.55 -10.5,0 -8.7,0.1 -15.225,0.325 -13.9,0.35 -4,0.5 -19.325,0.7 -0.9,0.675 -0.6,3.1 -15.5,3.825 -17.275,4.025 -10.775,6.85 -19.45,7.25 -11.9,8.9 -13.275,10.925 -15.4,11 -8.025,12.3 -19.275,12.475 -12.825,12.975 -0.75,13.75 -17.5,15 -8.7,15.3 -19.25,17.575 -11.9,18.1 -2.85,20.175 -6.175,20.225 -8.7,20.7 -0.9,21.375 -7.3,21.775 -3.075,22.625 -19.15,26 -0.85,26.05
I2C1_SCL: R13.1 TP10.1 U1.4 U3.17 U7.5 | length 16.4
  Top Layer w0.2: v1(-10.825,1.05) -10,1.875 -10,4.956 -9.156,5.8 U3.17 ; U1.4 v2(-9.325,-0.425) -9.325,1.014 v1(-9.3,1.039) -9.232,1.107 -8.307,1.107 R13.1
  Bottom Layer w0.2: v1(-10.825,1.05) -9.315,1.05 -9.304,1.039 v1(-9.3,1.039) ; v2(-9.325,-0.425) -9.325,-0.6 -9.29,-0.6 -8.075,-1.815 -8.075,-2.05 -7.975,-2.15 U7.5
I2C1_SDA: R12.1 TP9.1 U1.3 U3.18 U7.6 | length 16
  Top Layer w0.2: U1.3 -9.783,-3.875 -9.9,-3.758 v2(-9.9,-1) -9.9,1.381 TP9.1 ; U3.18 -8.579,5.121 -9.269,5.121 -9.6,4.79 -9.6,2.616 -9.183,2.198 TP9.1 ; R12.1 -8.668,1.8 -8.966,2.098 TP9.1
  Bottom Layer w0.2: v2(-9.9,-1) -9.456,-1 -8.475,-1.981 -8.475,-2.575 -8,-3.05 U7.6
NetC5_2: C5.2 F1.2 U6.1 | length 4.4
  Top Layer w0.6: F1.2 -17.375,22.125 -17.175,21.925 -17.175,21.475 -16.9,21.2 C5.2 -16.85,20.35 -15.025,20.35 U6.1
NetQ1_1: Q1.1 R6.1 | length 4.5
  Top Layer w0.2: R6.1@-15.991,9.275 -12.45,9.275 -12.325,9.4 Q1.1
SENSE+: R1.2 R3.1 R7.2 TP3.1 U2.3 | length 16.9
  Top Layer w0.102: -14.625,0.75 -14.625,-11.133 -14.508,-11.25 R1.2@-14.1,-11.25
  Top Layer w0.2: R7.2 TP3.1@-14.95,1.075 ; -14.625,0.75 TP3.1@-14.95,1.075 ; R3.1 -13.65,2.55 U2.3 -15.05,1.175 TP3.1@-14.95,1.075
SENSE-: C2.2 C3.2 R2.2 R4.1 R5.2 TP4.1 U2.4 | length 10
  Top Layer w0.2: R2.2 -15.25,7.875 -14.975,7.6 -14.975,6.6 ; C2.2 -15,6.575 -14.975,6.6 ; R4.1 -14.1,3.95 -14.3,4.15 -14.3,5.1 -14.3,5.175 ; C3.2 -14.225,5.25 -14.3,5.175 ; R5.2 -14.1,6.4 -14.3,6.2 -14.3,5.25 -14.3,5.175 ; -14.975,6.6 -14.975,5.175 U2.4 -14.975,5.1 -14.375,5.1 -14.3,5.175
SENSOR_RX+: P1.3 R8.2 U4.8 U8.1 | length 9.6
  Top Layer w0.2: P1.3 -10.312,23 -9.262,21.95 -8.525,21.95 -7.137,20.562 -7.137,19.087 U8.1 -7.125,18.28 -6.85,18.005 R8.2 ; U4.8 R8.2@-6.805,17.905
SENSOR_RX-: P1.6 R8.1 U4.7 U8.2 | length 12.1
  Top Layer w0.2: U4.7 -5.535,17.575 -5.225,17.885 U8.2 -5.225,21.425 v2(-4.775,21.875)
  Bottom Layer w0.2: P1.6 -7.24,24.05 -5.755,24.05 -4.775,23.07 v2(-4.775,21.875)
SENSOR_TX+: P1.1 R11.2 U4.5 U9.2 | length 25.9
  Top Layer w0.2: P1.1 -14.86,24.05 -14.86,25.975 -14.245,26.59 -13.375,26.59 -12.76,25.975 -12.76,25.168 -12.082,24.49 -3.94,24.49 -1.9,22.45 U9.2 -2.6,19.025 -2.85,18.775 R11.2 ; U4.5 -2.995,17.475 R11.2@-2.7,17.77
SENSOR_TX-: P1.2 R11.1 U4.6 U9.1 | length 17.6
  Top Layer w0.2: P1.2 -12.36,24.09 -5.773,24.09 -3.8,22.117 U9.1 -3.8,18.317 -3.917,18.2 -4,18.2 -4.25,17.95 R11.1 ; U4.6 -4.265,17.575 -4.1,17.74 R11.1@-4.1,17.85
SWCLK: J1.4 U3.20 | length 7.1
  Top Layer w0.2: U3.20 -5.425,3.85 v2(-4.975,3.4)
  Bottom Layer w0.2: v2(-4.975,3.4) -4.975,3.862 -4.65,4.187 -4.65,4.65 -3.87,5.43 J1.4 J1.4@-3.095,5.475
SWDIO: J1.2 U3.19 | length 6.4
  Top Layer w0.2: U3.19 -5.125,4.5 v2(-4.125,3.5)
  Bottom Layer w0.2: v2(-4.125,3.5) -4.125,3.88 -3.845,4.16 J1.2
USART1_RX: TP1.1 U3.9 U4.2 | length 6.9
  Top Layer w0.2: U4.2 -5.535,9.6 -4.985,9.05 U3.9 -1.475,9.05 TP1.1@-1,9.525
USART1_TX: TP8.1 U3.8 U4.3 | length 11.7
  Top Layer w0.2: U4.3 -4.265,12.2 -4.865,12.8 -5.793,12.8 -6.205,12.388 -6.205,9.6 -5.005,8.4 U3.8 -1.681,8.4 -1.181,7.9 TP8.1@-1.05,7.9
VBRIDGE: C3.1 Q1.3 R3.2 R4.2 TP2.1 | length 9.9
  Top Layer w0.2: Q1.3 -12.275,7.85 -11.85,7.425 -11.85,5.25 ; TP2.1 -12.6,2.05 R3.2 -11.967,2.65 -11.85,2.767 -11.85,3.95 ; R4.2 -11.85,3.95 ; C3.1 -11.85,5.25 ; -11.85,3.95 -11.85,5.25
VFB: C2.1 R2.1 R6.2 R14.2 TP5.1 U2.1 | length 19.4
  Top Layer w0.2: TP5.1 -16.975,2.525 U2.1 -16.95,3.375 -16,4.325 -16,5.501 -16.437,5.938 -17.608,5.938 -17.725,6.055 -17.725,6.575 -17.725,7.875 ; -17.75,6.575 C2.1 ; R2.1 -17.725,7.875 ; R6.2 -17.608,9.275 -17.725,9.158 -17.725,8.654 ; R14.2 -11,8.275 -12.25,8.275 -12.675,8.7 -17.679,8.7 -17.725,8.654 ; -17.725,7.875 -17.725,8.654
VFB_CLAMPED: C10.1 D1.1 R14.1 R15.1 U3.11 | length 5.5
  Top Layer w0.2: R14.1 R15.1 ; C10.1 -10.025,10.51 R15.1 ; v2(-8.85,10.525) -8.85,9.7 -9.7,9.7 -10,9.4 R15.1
  Bottom Layer w0.2: D1.1 -8.86,10.515 v2(-8.85,10.525)
VTEMP_ALARM: R16.2 RT1.2 U3.14 | length 19.7
  Top Layer w0.2: v2(-11.95,0.616) -11.95,1.508 -11.375,2.083 -11.375,2.8 ; R16.2 -11.35,2.825 -11.375,2.8 ; U3.14 -8.579,7.721 -9.454,7.721 -9.596,7.58 -11.235,7.58 -11.375,7.44 -11.375,2.8
  Bottom Layer w0.2: RT1.2 -14.075,-2.275 -11.95,-0.15 v2(-11.95,0.616)
pads on no net: J1.6 J1.7 J1.8 U3.2 U3.3 U3.6 U3.7 U3.10 U3.12 U3.13 U5.4 U7.1 U7.4 U7.7

## Polygon pours and split planes (outlines as drawn)
GND on Top Layer "GND_L01_P001" (solid, pour order 1): -0.75,-4.5
GND on Top Layer "GND_L01_P000" (solid, remove dead copper, pour order 0): -10.5,-6 -6,-6 -6,0 0,0 0,27 -20,27 -20,0 -10.5,0
GND on Bottom Layer "GND_L02_P002" (solid, pour order 2): -10.5,-6 -6,-6 -6,0 0,0 0,27 -20,27 -20,0 -10.5,0

## Silkscreen, mask and mechanical layers (free items; w line width, h text height)
Bottom Overlay:
  text "Sensor Module / 2020-04-08 / RevE" at 0,13.5 h1.5
Mechanical 1:
  the board outline again, w0.1
Dimensions:
  lines w0.05: -21,-22 3,-22 ; -21,-21 3,-21 ; -21,-1 3,-1 ; -21,0 3,0
  lines w0.1: -18,0 -18,27 ; -7,-9.32 -7,-8.05 ; -5.73,-8.05 -7,-8.05 ; -2,0 -2,27 ; 3.16,-18.21 -7,-8.05
  text "Pressure sensor and thermistor inside tube" at 4.5,-20 h1.25
  text "Tube cutaway" at -32.4,-20.75 h2 r90

## Dimensions
0,27 to 3,0 on Dimensions
-15,-12 to -13.5,-12 on Dimensions
0,27 to -13.5,-12 on Dimensions
0,27 to -20,27 on Dimensions
-21,0 to -21,-11 on Dimensions
-21,0 to -21,-22 on Dimensions

## Text inside footprints (layer, text, board x,y; h text height)
P1: Top Overlay "2" at -16.35,25.032 h1.27; Top Overlay "1" at -15.842,22.492 h1.27; Top Overlay "7" at -4.666,22.492 h1.27; Top Overlay "8" at -4.666,25.032 h1.27